# EAGLE board PreContV1 (EAGLE 6.1)
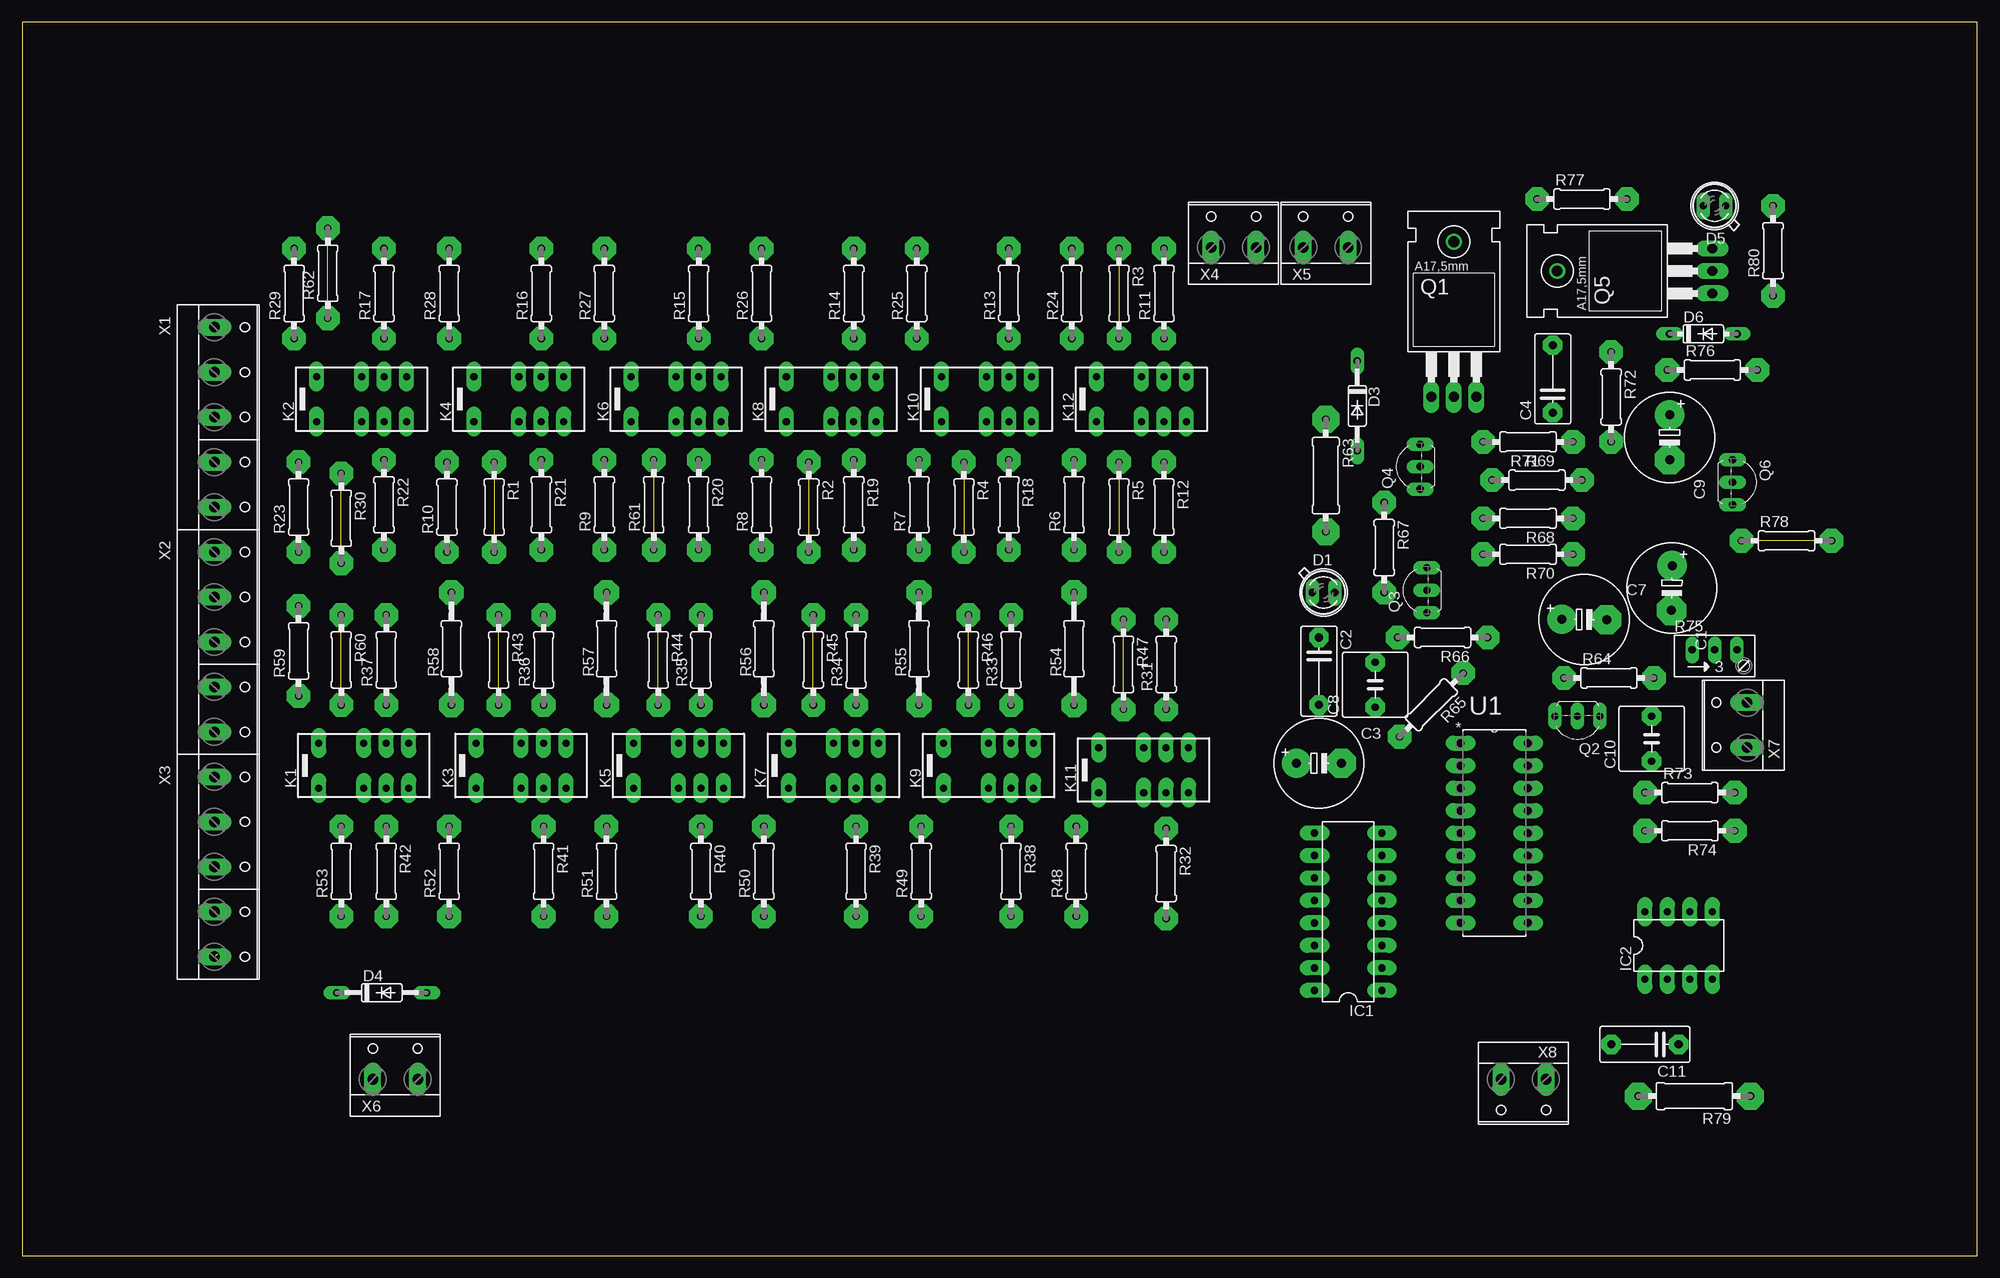
[diagram p0: board, top side]
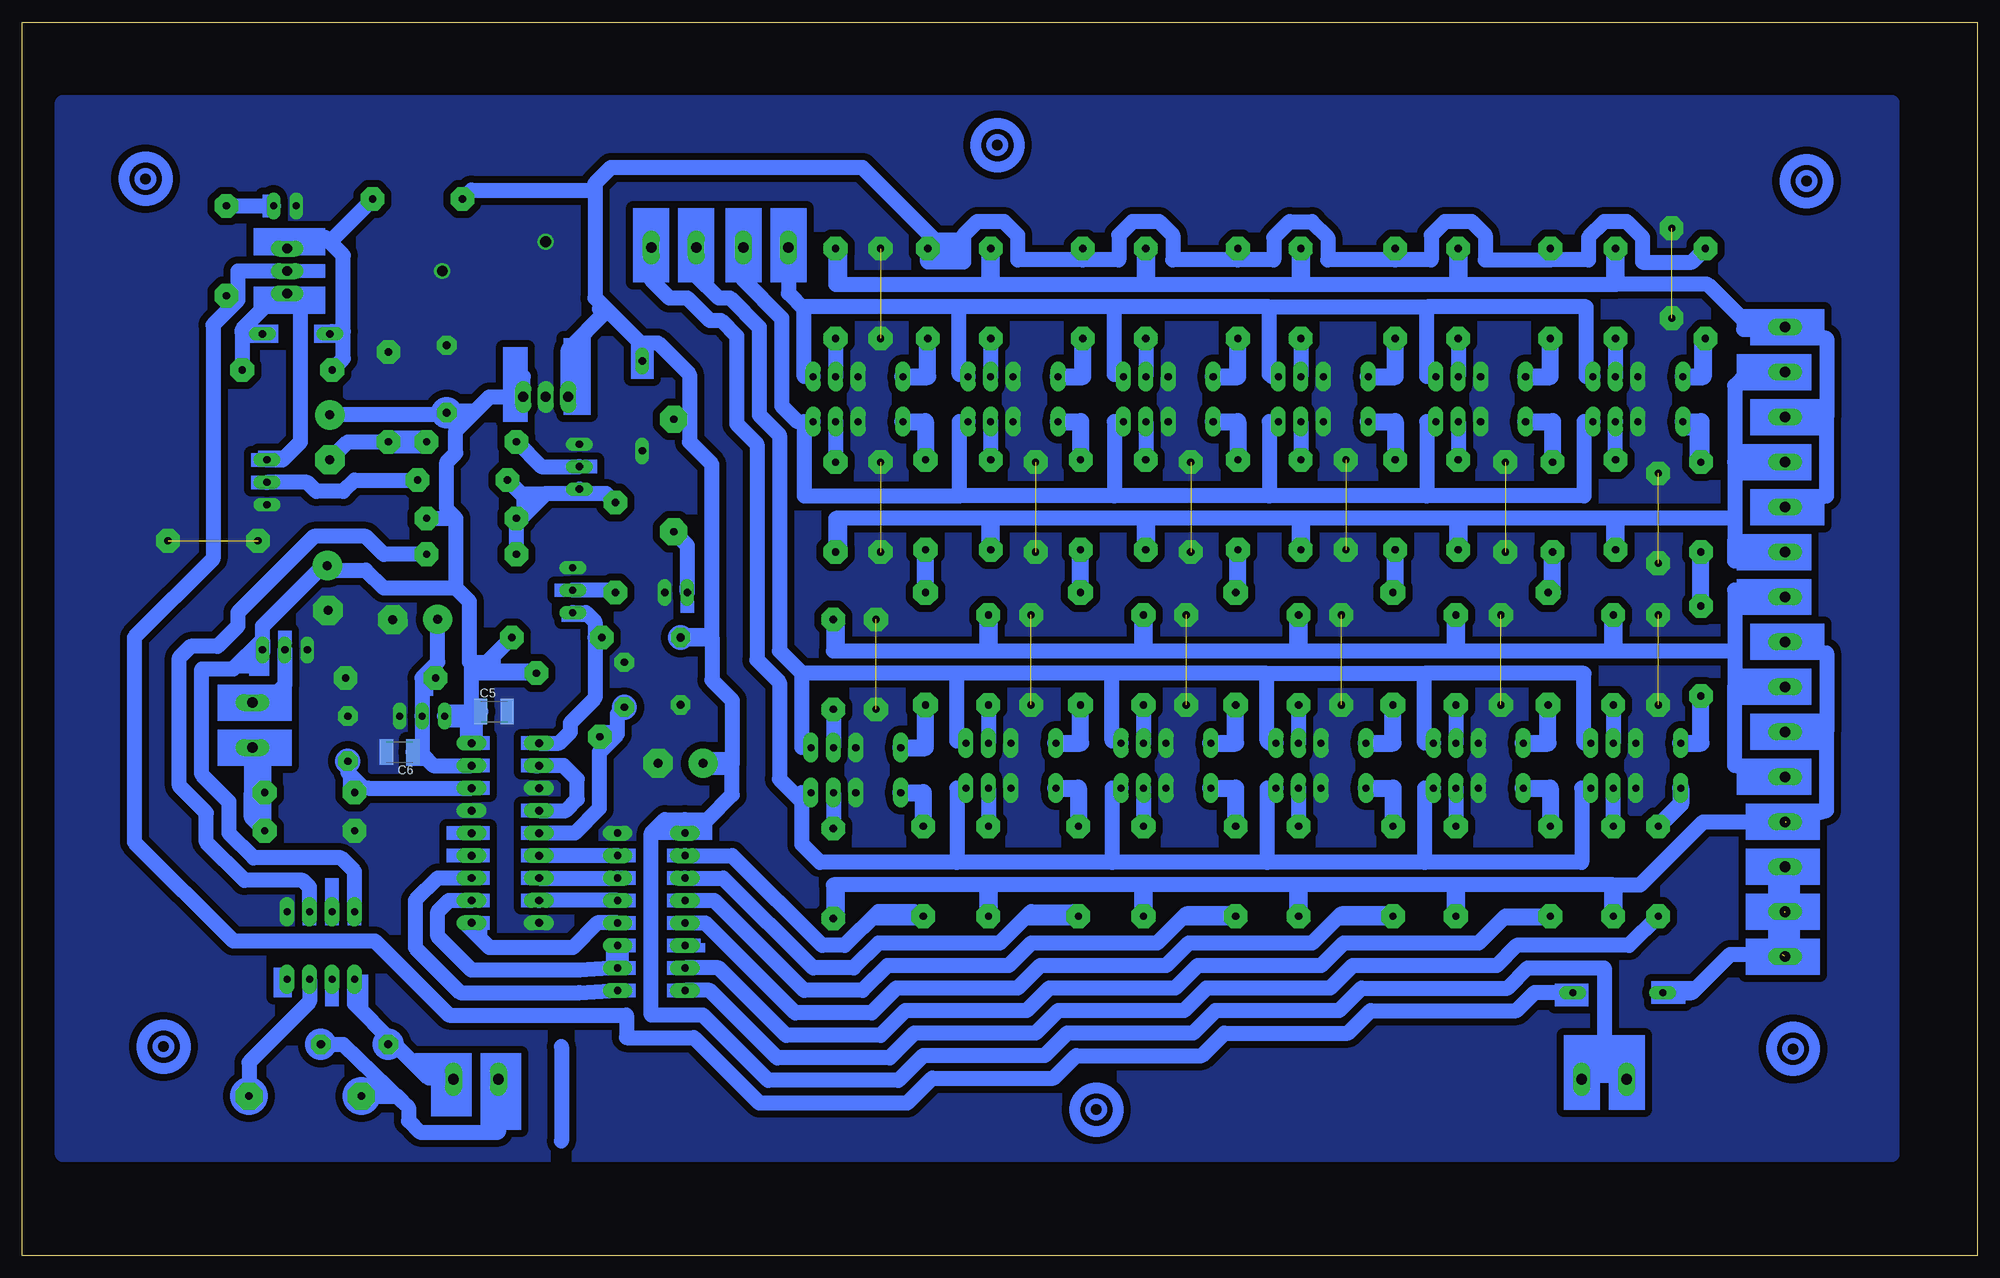
[diagram p1: board, bottom side, seen from below]

Size 220.96 x 139.37 mm. Coordinates in mm from the lower left corner, seen from the top.
Outline: 0,0 220.96,0 220.96,139.37 0,139.37 0,0
Copper layers (1*16): Top 0.035mm / dielectric 1.5mm / Bottom 0.035mm
Design rules: minimum track width 10mil, minimum drill 24mil, track to track 8mil, track to pad 8mil, pad to pad 8mil, via to via 8mil, smd to smd 8mil, copper to edge 40mil, drill to drill 8mil, minimum pad ring 14mil, minimum via ring 8mil, stop-mask expansion 4mil, vias tented up to drill 0mil, thermal gap 10mil

## Footprints (pad centres in the part's own frame; a part is rotated, then mirrored left to right if it is on the bottom)
E5-10,5 = drill 1.016 pad 3.302: + -2.54,0 | drill 1.016 pad 3.302 octagon: - 2.54,0
C075-042X103 = drill 0.914 pad 2.184 octagon: 1 -3.81,0; 2 3.81,0
C1210K = smd 1.5 x 2.9: 1 -1.5,0; 2 1.5,0
C050-075X075 = drill 0.813 pad 2.184 octagon: 1 -2.54,0; 2 2.54,0
SFH482 = drill 0.813 long: A -1.27,0; K 1.27,0
DO35-10 = drill 0.813 long: A 5.08,0; C -5.08,0
DO35-7 = drill 0.813 long: A 3.81,0; C -3.81,0
DIL16 = drill 0.813 pad 1.676 long: 1 -8.89,-3.81; 2 -6.35,-3.81; 3 -3.81,-3.81; 4 -1.27,-3.81; 5 1.27,-3.81; 6 3.81,-3.81; 7 6.35,-3.81; 8 8.89,-3.81; 9 8.89,3.81; 10 6.35,3.81; 11 3.81,3.81; 12 1.27,3.81; 13 -1.27,3.81; 14 -3.81,3.81; 15 -6.35,3.81; 16 -8.89,3.81
DIL08 = drill 0.813 pad 1.676 long: 1 -3.81,-3.81; 2 -1.27,-3.81; 3 1.27,-3.81; 4 3.81,-3.81; 5 3.81,3.81; 6 1.27,3.81; 7 -1.27,3.81; 8 -3.81,3.81
TX2 = drill 0.8 pad 1.676 long: 1 -5.08,-2.54; 3 0,-2.54; 4 2.54,-2.54; 5 5.08,-2.54; 8 5.08,2.54; 9 2.54,2.54; 10 0,2.54; 12 -5.08,2.54
TO220BH = drill 1.118 long: D 0,-6.35; G -2.54,-6.35; S 2.54,-6.35
TO92-EBC = drill 0.813 long: B 0,-1.27; C -2.54,-1.27; E 2.54,-1.27
0207/10 = drill 0.813 pad 2.667 octagon: 1 -5.08,0; 2 5.08,0
0207/12 = drill 0.813 pad 2.794 octagon: 1 -6.35,0; 2 6.35,0
0309/12 = drill 0.813 pad 3.048 octagon: 1 -6.35,0; 2 6.35,0
RJ9W = drill 0.813 long: A 2.54,0.635; E -2.54,0.635; S 0,0.635
DIP254P762X533-18P = drill 0.9 pad 1.676 long: 1 -7.62,20.32; 2 -7.62,17.78; 3 -7.62,15.24; 4 -7.62,12.7; 5 -7.62,10.16; 6 -7.62,7.62; 7 -7.62,5.08; 8 -7.62,2.54; 9 -7.62,0; 10 0,0; 11 0,2.54; 12 0,5.08; 13 0,7.62; 14 0,10.16; 15 0,12.7; 16 0,15.24; 17 0,17.78; 18 0,20.32
W237-5P = drill 1.194 long: 1 -10.16,-0.635; 2 -5.08,-0.635; 3 0,-0.635; 4 5.08,-0.635; 5 10.16,-0.635
W237-132 = drill 1.194 long: 1 -2.54,-0.635; 2 2.54,-0.635

## Placement (x,y rotation side)
C1  1500uF  [E5-10,5]  186.44,75.44 269.2 top
C2  68nF  [C075-042X103]  146.56,66.04 270 top
C3  100uF  [E5-10,5]  146.56,55.63 0 top
C4  68nF  [C075-042X103]  172.97,99.06 90 top
C5  .2  [C1210K]  167.64,61.47 0 bottom
C6  .2  [C1210K]  178.31,56.9 180 bottom
C7  100uF  [E5-10,5]  176.53,71.88 359.7 top
C8  100pF  [C050-075X075]  152.91,64.52 90 top
C9  220uF  [E5-10,5]  186.18,92.46 270 top
C10  10nF  [C050-075X075]  184.15,58.42 90 top
C11  10nF  [C075-042X103]  183.39,23.88 180 top
D1  WHT  [SFH482]  147.07,74.93 0 top
D3  4004  [DO35-10]  150.88,96.01 270 top
D4  0R  [DO35-10]  40.64,29.72 0 top
D5  BLU  [SFH482]  191.26,118.62 180 top
D6  27V  [DO35-7]  189.99,104.14 0 top
IC1  ULN2003AN  [DIL16]  149.86,38.86 90 top
IC2  MID400  [DIL08]  187.2,35.05 0 top
K1  5V  [TX2]  38.61,55.37 0 top
K2  5V  [TX2]  38.35,96.77 0 top
K3  5V  [TX2]  56.39,55.37 0 top
K4  5V  [TX2]  56.13,96.77 0 top
K5  5V  [TX2]  74.17,55.37 0 top
K6  5V  [TX2]  73.91,96.77 0 top
K7  5V  [TX2]  91.69,55.37 0 top
K8  5V  [TX2]  91.44,96.77 0 top
K9  5V  [TX2]  109.22,55.37 0 top
K10  5V  [TX2]  108.97,96.77 0 top
K11  5V  [TX2]  126.75,54.86 0 top
K12  5V  [TX2]  126.49,96.77 0 top
Q1  7805  [TO220BH]  161.8,103.38 0 top
Q2  LM317L  [TO92-EBC]  175.77,59.69 180 top
Q3  BC560C  [TO92-EBC]  157.48,75.18 90 top
Q4  BC560C  [TO92-EBC]  156.72,89.15 90 top
Q5  PMOS  [TO220BH]  184.66,111.25 90 top
Q6  BC560C  [TO92-EBC]  194.56,87.38 270 top
R1  0  [0207/10]  53.34,84.58 270 top
R2  0  [0207/10]  88.9,84.58 270 top
R3  0  [0207/10]  123.95,108.71 270 top
R4  0  [0207/10]  106.43,84.58 270 top
R5  0  [0207/10]  123.95,84.58 270 top
R6  27  [0207/10]  118.87,84.84 90 top
R7  27  [0207/10]  101.35,84.84 90 top
R8  27  [0207/10]  83.57,84.84 90 top
R9  27  [0207/10]  65.79,84.84 90 top
R10  27  [0207/10]  48.01,84.58 90 top
R11  124  [0207/10]  129.03,108.71 90 top
R12  124  [0207/10]  129.03,84.58 270 top
R13  249  [0207/10]  111.51,108.71 90 top
R14  499  [0207/10]  93.98,108.71 90 top
R15  1K  [0207/10]  76.45,108.71 90 top
R16  2K  [0207/10]  58.67,108.71 90 top
R17  4K02  [0207/10]  40.89,108.71 90 top
R18  249  [0207/10]  111.51,84.84 270 top
R19  499  [0207/10]  93.98,84.84 270 top
R20  1K  [0207/10]  76.45,84.84 270 top
R21  2K  [0207/10]  58.67,84.84 270 top
R22  4K02  [0207/10]  40.89,84.84 270 top
R23  27  [0207/10]  31.24,84.58 90 top
R24  27  [0207/10]  118.62,108.71 90 top
R25  27  [0207/10]  101.09,108.71 90 top
R26  27  [0207/10]  83.57,108.71 90 top
R27  27  [0207/10]  65.79,108.71 90 top
R28  27  [0207/10]  48.26,108.71 90 top
R29  27  [0207/10]  30.73,108.71 90 top
R30  0  [0207/10]  36.07,83.31 270 top
R31  124  [0207/10]  129.29,66.8 90 top
R32  124  [0207/10]  129.29,43.18 270 top
R33  249  [0207/10]  111.76,67.31 90 top
R34  499  [0207/10]  94.23,67.31 90 top
R35  1K  [0207/10]  76.71,67.31 90 top
R36  2K  [0207/10]  58.93,67.31 90 top
R37  4K02  [0207/10]  41.15,67.31 90 top
R38  249  [0207/10]  111.76,43.43 270 top
R39  499  [0207/10]  94.23,43.43 270 top
R40  1K  [0207/10]  76.71,43.43 270 top
R41  2K  [0207/10]  58.93,43.43 270 top
R42  4K02  [0207/10]  41.15,43.43 270 top
R43  0  [0207/10]  53.85,67.31 270 top
R44  0  [0207/10]  71.88,67.31 270 top
R45  0  [0207/10]  89.41,67.31 270 top
R46  0  [0207/10]  106.93,67.31 270 top
R47  0  [0207/10]  124.46,66.8 270 top
R48  27  [0207/10]  119.13,43.43 90 top
R49  27  [0207/10]  101.6,43.43 90 top
R50  27  [0207/10]  83.82,43.43 90 top
R51  27  [0207/10]  66.04,43.43 90 top
R52  27  [0207/10]  48.26,43.43 90 top
R53  27  [0207/10]  36.07,43.43 90 top
R54  27  [0207/12]  118.87,68.58 90 top
R55  27  [0207/12]  101.35,68.58 90 top
R56  27  [0207/12]  83.82,68.58 90 top
R57  27  [0207/12]  66.04,68.58 90 top
R58  27  [0207/12]  48.51,68.58 90 top
R59  27  [0207/10]  31.24,68.33 90 top
R60  0  [0207/10]  36.07,67.31 270 top
R61  0  [0207/10]  71.37,84.84 90 top
R62  0  [0207/10]  34.54,111 90 top
R63  2K2  [0309/12]  147.32,88.14 270 top
R64  150  [0207/10]  179.32,65.28 0 top
R65  100K  [0207/10]  159.26,62.23 225 top
R66  2K2  [0207/10]  160.53,69.85 180 top
R67  25K  [0207/10]  153.92,80.01 270 top
R68  3K3  [0207/10]  170.18,83.31 180 top
R69  25K  [0207/10]  170.18,91.95 180 top
R70  0  [0207/10]  170.18,79.25 180 top
R71  25K  [0207/10]  171.2,87.63 0 top
R72  220K  [0207/10]  179.58,97.03 270 top
R73  4K7  [0207/10]  188.47,52.32 0 top
R74  1K  [0207/10]  188.47,48.01 180 top
R75  5K  [RJ9W]  191.26,67.82 0 top
R76  25K  [0207/10]  191.01,100.08 0 top
R77  0  [0207/10]  176.28,119.38 0 top
R78  0  [0207/10]  199.39,80.77 0 top
R79  33K  [0309/12]  188.98,18.03 180 top
R80  3K3  [0207/10]  197.87,113.54 90 top
U1  MX7576  [DIP254P762X533-18P]  170.18,37.59 0 top
X1  [W237-5P]  22.35,94.74 270 top
X2  [W237-5P]  22.35,69.34 270 top
X3  [W237-5P]  22.35,43.94 270 top
X4  [W237-132]  136.91,114.55 0 top
X5  [W237-132]  147.32,114.55 0 top
X6  [W237-132]  42.16,20.57 0 top
X7  [W237-132]  194.31,59.94 90 top
X8  [W237-132]  169.67,19.3 180 top

## Library data of the parts
C1-C11 R1-R74 R76-R80 = resistor
D1 D5 = led
D3 D4 D6 = diode
IC1 = uln-udn
IC2 = linear
K1-K12 = relay; MF: AROMAT/ MATSUSHITA; MPN: TX2-12V; OC_FARNELL: 1200952; OC_NEWARK: 67K1295
Q1 Q5 = transistor-power
Q2-Q4 Q6 = transistor-npn
R75 = pot
U1 = ADI-Phase-2; MPN: AD7575JNZ; OC_FARNELL: 1079349; OC_NEWARK: 19M0875; PACKAGE: DIP-18; SUPPLIER: Analog Devices
X1-X8 = con-wago-508; OC_FARNELL: unknown; OC_NEWARK: unknown

## Nets
GND: C1.- C2.2 C3.- C4.2 C5.2 C6.2 C7.- C8.2 C10.2 D1.K D3.A D5.K IC1.8 IC2.5 K1.3 K1.10 K2.3 K2.10 K3.3 K3.10 K4.3 K4.10 K5.3 K5.10 K6.3 K6.10 K7.3 K7.10 K8.3 K8.10 K9.3 K9.10 K10.3 K10.10 K11.3 K11.10 K12.3 K12.10 Q1.D Q2.C Q3.E Q4.E Q6.E R1.1 R1.2 R2.1 R2.2 R3.1 R3.2 R4.1 R4.2 R5.1 R5.2 R30.1 R30.2 R43.1 R43.2 R44.1 R44.2 R45.1 R45.2 R46.1 R46.2 R47.1 R47.2 R60.1 R60.2 R61.1 R61.2 R62.1 R62.2 R64.2 R72.1 R74.2 R75.E R78.1 R78.2 U1.3 U1.9 U1.15
N$1: D4.A Q5.D R80.1
N$2: R32.2 R38.2 R39.2 R40.2 R41.2 R42.2 X2.3 X2.5 X3.2
N$3: R31.2 R33.2 R34.2 R35.2 R36.2 R37.2 X2.2 X2.4 X3.1
N$4: K1.8 K3.8 K5.8 K7.8 K9.8 K11.8 X5.1
N$5: K1.5 K3.5 K5.5 K7.5 K9.5 K11.5 X5.2
N$6: K11.9 R31.1
N$7: K11.4 R32.1
N$8: K2.8 K4.8 K6.8 K8.8 K10.8 K12.8 X4.1
N$9: K2.5 K4.5 K6.5 K8.5 K10.5 K12.5 X4.2
N$10: R12.2 R18.2 R19.2 R20.2 R21.2 R22.2 X1.2 X1.4 X2.1
N$11: K12.1 R6.2
N$12: K10.1 R7.2
N$13: K8.1 R8.2
N$14: K6.1 R9.2
N$15: R11.2 R13.2 R14.2 R15.2 R16.2 R17.2 X1.1 X1.3 X1.5
N$16: K4.1 R10.2
N$17: K2.1 R23.2
N$18: K12.12 R24.1
N$19: K10.12 R25.1
N$20: K12.9 R11.1
N$21: K12.4 R12.1
N$22: K10.9 R13.1
N$23: K8.9 R14.1
N$24: K6.9 R15.1
N$25: K2.9 R17.1
N$26: K4.9 R16.1
N$27: K10.4 R18.1
N$28: K8.4 R19.1
N$29: K6.4 R20.1
N$30: K4.4 R21.1
N$31: K2.4 R22.1
N$32: K8.12 R26.1
N$33: K6.12 R27.1
N$34: K4.12 R28.1
N$35: K2.12 R29.1
N$36: C2.1 C3.+ D3.C IC1.9 Q1.G R24.2 R25.2 R26.2 R27.2 R28.2 R29.2 R63.1 R77.1 X6.1 X6.2
N$37: K9.9 R33.1
N$38: K7.9 R34.1
N$39: K5.9 R35.1
N$40: K1.9 R37.1
N$41: K3.9 R36.1
N$42: K9.4 R38.1
N$43: K7.4 R39.1
N$44: K5.4 R40.1
N$45: K3.4 R41.1
N$46: K1.4 R42.1
N$47: K11.1 R48.2
N$48: K9.1 R49.2
N$49: K7.1 R50.2
N$50: K5.1 R51.2
N$51: K3.1 R52.2
N$52: K1.1 R53.2
N$53: K11.12 R54.1
N$54: K9.12 R55.1
N$55: K7.12 R56.1
N$56: K5.12 R57.1
N$57: K3.12 R58.1
N$58: K1.12 R59.1
N$59: R6.1 R54.2
N$60: IC1.10 R48.1
N$61: IC1.11 R49.1
N$62: R7.1 R55.2
N$63: R8.1 R56.2
N$64: R9.1 R57.2
N$65: R10.1 R58.2
N$66: R23.1 R59.2
N$67: IC1.12 R50.1
N$68: IC1.13 R51.1
N$69: IC1.15 R52.1
N$70: IC1.16 R53.1
N$71: IC1.7 U1.6
N$72: IC1.6 U1.7
N$73: IC1.5 U1.8
N$74: IC1.4 U1.10
N$75: IC1.2 IC1.3 U1.11
N$76: IC1.1 U1.12
N$77: U1.2 U1.4
N$78: C1.+ C4.1 C5.1 C9.+ IC2.8 Q1.S Q2.E R65.1 R66.1 R68.1 R75.A U1.18
N$79: D1.A R63.2
N$80: C6.1 C7.+ Q2.B R64.1 U1.17
N$81: Q3.C R66.2 U1.1
N$82: C8.1 R65.2 U1.5
N$83: Q6.B R71.2
N$84: C10.1 R73.1 U1.16
N$85: Q3.B R67.2
N$86: Q4.C R67.1 R68.2 R70.2 R71.1
N$87: Q4.B R69.2
N$88: C9.- R69.1 R72.2
N$89: R73.2 R74.1 X7.1
N$90: R75.S X7.2
N$91: D6.A Q5.G Q6.C R76.2
N$92: IC2.6 R70.1
N$93: C11.2 IC2.1 X8.1
N$94: IC2.3 R79.1
N$95: D6.C Q5.S R76.1 R77.2
N$96: D4.C X3.3 X3.4 X3.5
N$97: C11.1 R79.2 X8.2
N$98: D5.A R80.2

## Tracks (layer width: path | path; a pad name or v marks a point on that pad's centre or on a via)
GND  (via drill 1.2)  (15 unrouted)
  other vias: 161.8,114.55 173.48,111.25
  pour Bottom (isolate 0.813, no thermals): 9.65,130.3 9.65,11.43 216.41,11.43 216.41,130.3
N$1
  Bottom 1.676: Q5.D 196.6,111.25 196.6,108.2 | 196.6,108.2 196.6,107.95 199.39,105.16 199.39,78.74 208.28,69.85 208.28,46.74 197.1,35.56 181.1,35.56 172.72,27.18 152.65,27.18 152.65,24.64 145.03,24.64 137.67,17.27 120.9,17.27 118.11,20.07 104.39,20.07 101.85,22.61 87.63,22.61 85.09,25.15 71.12,25.15 68.58,27.69 52.07,27.69 50.04,29.72 D4.A | R80.1 197.36,108.46 197.1,108.2 196.6,108.2
N$2  (1 unrouted)
  Bottom 1.676: X3.2 17.02,50.29 17.02,59.18 | 17.02,59.18 X2.5 | X2.3 17.02,68.07 17.02,59.18 | R42.2 41.15,41.91 | 41.15,41.91 58.93,41.91 | 58.93,41.91 76.71,41.91 | 76.71,41.91 94.23,41.91 | 94.23,41.91 111.76,41.91 | 111.76,41.91 129.29,41.91 R32.2 | R38.2 111.76,41.91 | R41.2 58.93,41.91 | R40.2 76.71,41.91 | R39.2 94.23,41.91 | 41.15,41.91 38.1,41.91 30.99,49.02 21.59,49.02
N$3
  Bottom 1.676: X3.1 27.43,55.37 27.43,64.26 | 27.43,64.26 X2.4 21.59,64.26 | X2.2 27.43,75.18 27.43,68.33 | 27.43,68.33 27.43,64.26 | 111.76,68.33 129.29,68.33 R31.2 | 111.76,68.33 94.23,68.33 | 94.23,68.33 76.71,68.33 | R36.2 58.93,68.33 | R35.2 76.71,68.33 | R34.2 94.23,68.33 | R33.2 111.76,68.33 | 76.71,68.33 58.93,68.33 | 58.93,68.33 41.15,68.33 | 41.15,68.33 R37.2 | 41.15,68.33 27.43,68.33
N$4
  Bottom 1.676: K1.8 44.45,57.91 44.45,65.79 62.48,65.79 | K7.8 97.79,58.17 97.79,65.79 | K11.8 132.84,57.4 132.84,65.79 | 80.26,58.17 80.01,57.91 K5.8 79.76,57.91 80.26,58.17 | K3.8 62.48,57.91 62.48,65.79 | 80.26,65.79 97.79,65.79 | 97.79,65.79 115.32,65.79 | 115.32,65.79 132.84,65.79 | K9.8 115.32,58.17 115.32,65.79 | 80.26,58.17 80.26,65.79 | 80.26,65.79 62.48,65.79 | 132.84,65.79 135.38,68.33 135.38,92.71 137.67,95 137.67,104.9 140.97,108.2 142.24,108.2 144.78,110.74 X5.1
N$5
  Bottom 1.676: K1.5 44.7,52.83 44.7,44.45 62.48,44.45 | K11.5 132.84,52.32 132.84,51.31 | K9.5 115.32,52.83 115.32,44.45 | K7.5 97.79,52.83 97.79,44.45 | K5.5 80.26,52.83 80.26,44.45 | K3.5 62.48,52.83 62.48,44.45 | 62.48,44.45 80.26,44.45 | 80.26,44.45 97.79,44.45 | 97.79,44.45 115.32,44.45 | 132.84,51.31 135.38,53.85 135.38,64.77 137.92,67.31 137.92,91.69 140.21,93.98 140.21,103.89 141.99,105.66 143.26,105.66 145.8,108.2 147.83,108.2 149.86,110.24 X5.2 | 115.32,44.45 130.81,44.45 132.84,46.48 132.84,51.31
N$6
  Bottom 1.676: R31.1 K11.9
N$7
  Bottom 1.676: K11.4 R32.1
N$8
  Bottom 1.676: K2.8 44.2,99.31 44.2,107.19 62.23,107.19 | K8.8 97.54,99.57 97.54,107.19 | K12.8 132.59,99.31 132.59,106.93 | K4.8 62.23,99.31 62.23,107.19 | 80.01,107.19 97.54,107.19 | 97.54,107.19 115.06,107.19 | 115.06,107.19 132.59,107.19 132.59,106.93 | K10.8 115.06,99.57 115.06,107.19 | 79.76,99.31 K6.8 79.5,99.31 80.01,99.57 80.01,107.19 | 80.01,107.19 62.23,107.19 | X4.1 134.37,108.71 132.59,106.93
N$9
  Bottom 1.676: K2.5 44.45,94.23 44.45,85.85 62.23,85.85 | 132.59,94.23 132.59,85.85 115.06,85.85 | K10.5 115.06,94.23 115.06,85.85 | K8.5 97.54,94.23 97.54,85.85 | K6.5 80.01,94.23 80.01,85.85 | K4.5 62.23,94.23 62.23,85.85 | 62.23,85.85 80.01,85.85 | 80.01,85.85 97.54,85.85 | 97.54,85.85 115.06,85.85 | 132.59,94.23 133.35,94.23 135.13,96.01 135.13,105.92 139.45,110.24 X4.2 | K12.5 132.59,94.23
N$10
  Bottom 1.676: X2.1 27.43,80.77 | 27.43,89.66 X1.4 | R22.2 40.89,83.31 | 40.89,83.31 58.67,83.31 | 58.67,83.31 76.45,83.31 | 76.45,83.31 93.98,83.31 | 93.98,83.31 111.51,83.31 | 111.51,83.31 129.03,83.31 R12.2 | R18.2 111.51,83.31 | R21.2 58.67,83.31 | R20.2 76.45,83.31 | R19.2 93.98,83.31 | 27.43,78.49 27.43,80.77 | X1.2 21.97,99.57 26.16,99.57 27.43,98.3 27.43,89.66 | 27.43,83.31 40.89,83.31 | 27.43,89.66 27.43,83.31 | 27.43,83.31 27.43,80.77
N$11
  Bottom 1.93: K12.1 118.87,94.23 R6.2
N$12
  Bottom 1.93: K10.1 101.35,94.23 R7.2
N$13
  Bottom 1.93: K8.1 83.57,94.23 R8.2
N$14
  Bottom 1.93: K6.1 65.79,94.23 R9.2
N$15
  Bottom 1.676: X1.1 17.02,103.63 17.02,94.74 | 17.02,94.74 X1.3 | X1.5 17.02,85.85 17.02,94.74 | 111.51,109.73 129.03,109.73 R11.2 | 111.51,109.73 93.98,109.73 | 93.98,109.73 76.45,109.73 | R16.2 58.67,109.73 | R15.2 76.45,109.73 | R14.2 93.98,109.73 | R13.2 111.51,109.73 | 76.45,109.73 58.67,109.73 | 58.67,109.73 40.89,109.73 | 40.89,109.73 R17.2 | X1.1 21.72,105.92 22.73,104.9 | 40.89,109.73 30.48,109.73 26.42,105.66 26.42,104.65 26.16,104.9 25.65,104.9 | 25.65,104.9 22.1,104.9 | 25.65,104.9 25.91,104.65 | 25.91,104.65 26.16,104.65 | 25.91,104.65 23.62,104.65 23.37,104.9 X1.1
N$16
  Bottom 1.93: K4.1 48.01,94.23 R10.2
N$17
  Bottom 1.676: 33.27,94.49 K2.1
  Bottom 1.93: K2.1 31.24,94.23 R23.2
N$18
  Bottom 1.93: K12.12 118.62,99.31 R24.1
N$19
  Bottom 1.93: K10.12 101.09,99.31 R25.1
N$20
  Bottom 1.676: R11.1 K12.9
N$21
  Bottom 1.676: K12.4 R12.1
N$22
  Bottom 1.676: R13.1 K10.9
N$23
  Bottom 1.676: R14.1 K8.9
N$24
  Bottom 1.676: R15.1 K6.9
N$25
  Bottom 1.676: R17.1 K2.9
N$26
  Bottom 1.676: R16.1 K4.9
N$27
  Bottom 1.676: K10.4 R18.1
N$28
  Bottom 1.676: K8.4 R19.1
N$29
  Bottom 1.676: K6.4 R20.1
N$30
  Bottom 1.676: K4.4 R21.1
N$31
  Bottom 1.676: R22.1 K2.4
N$32
  Bottom 1.93: K8.12 83.57,99.31 R26.1
N$33
  Bottom 1.93: K6.12 65.79,99.31 R27.1
N$34
  Bottom 1.93: K4.12 48.26,99.31 R28.1
N$35
  Bottom 1.93: K2.12 30.99,99.31 30.99,103.63 R29.1
N$36
  Bottom 1.676: 65.79,112.52 73.41,112.52 73.41,115.06 75.18,116.84 77.72,116.84 79.5,115.06 79.5,112.52 83.57,112.52 | 83.57,112.52 90.93,112.52 90.93,115.32 92.46,116.84 95.5,116.84 97.03,115.32 97.03,112.52 101.09,112.52 | 101.09,112.52 108.46,112.52 108.46,115.32 109.98,116.84 113.03,116.84 114.55,115.32 114.55,112.27 118.62,112.27 | 48.26,112.52 55.63,112.52 55.63,115.32 57.15,116.84 60.2,116.84 61.72,115.32 61.72,112.52 65.79,112.52 | R28.2 48.26,112.52 | R27.2 65.79,112.52 | R26.2 83.57,112.52 | R25.2 101.09,112.52 | 118.62,112.27 R24.2 | R29.2 32.26,112.27 37.85,112.27 37.85,115.06 39.62,116.84 42.16,116.84 43.94,115.06 43.94,112.52 48.26,112.52 | 118.62,112.27 117.86,113.03 116.08,113.03 125.98,122.94 154.43,122.94 156.21,121.16 156.21,120.4 | 156.21,120.4 156.21,108.2 155.32,107.31 | 155.32,107.31 154.69,106.68 | 154.69,106.68 151.13,103.12 150.88,103.12 | 150.88,103.12 149.1,103.12 145.54,99.57 145.54,94.49 | 145.54,94.49 145.54,91.95 143,89.41 143,69.85 | 143,69.85 143,65.02 140.72,62.74 140.72,55.63 | C3.+ 140.72,55.63 | C2.1 143,69.85 | Q1.G 159.26,102.36 154.94,106.68 154.69,106.68 | X6.1 39.75,20.83 42.16,20.83 | 44.7,20.83 X6.2 | 44.96,21.08 44.7,20.83 | D3.C 150.88,103.12 | 42.16,20.83 44.7,20.83 | 155.7,106.93 155.32,107.31 | R63.1 145.54,94.49 | R77.1 170.18,120.4 156.21,120.4 | 42.16,20.83 42.16,32.51 50.8,32.51 53.09,30.23 69.6,30.23 72.14,27.69 86.11,27.69 88.65,25.15 102.87,25.15 105.41,22.61 119.13,22.61 121.92,19.81 136.65,19.81 144.02,27.18 149.86,27.18 149.86,47.75 148.34,49.28 146.05,49.28 | 146.05,49.28 143.51,49.28 140.72,52.07 140.72,55.63 | IC1.9 146.05,49.28
N$37
  Bottom 1.676: R33.1 K9.9
N$38
  Bottom 1.676: R34.1 K7.9
N$39
  Bottom 1.676: R35.1 K5.9
N$40
  Bottom 1.676: R37.1 K1.9
N$41
  Bottom 1.676: R36.1 K3.9
N$42
  Bottom 1.676: K9.4 R38.1
N$43
  Bottom 1.676: K7.4 R39.1
N$44
  Bottom 1.676: K5.4 R40.1
N$45
  Bottom 1.676: K3.4 R41.1
N$46
  Bottom 1.676: R42.1 K1.4
N$47
  Bottom 1.93: K11.1 119.13,52.32 R48.2
N$48
  Bottom 1.93: K9.1 101.6,52.83 R49.2
N$49
  Bottom 1.93: K7.1 83.82,52.83 R50.2
N$50
  Bottom 1.93: K5.1 66.04,52.83 R51.2
N$51
  Bottom 1.93: K3.1 48.26,52.83 R52.2
N$52
  Bottom 1.93: K1.1 33.53,51.05 R53.2
N$53
  Bottom 1.93: K11.12 118.87,57.4 R54.1
N$54
  Bottom 1.93: K9.12 101.35,57.91 R55.1
N$55
  Bottom 1.93: K7.12 83.82,57.91 R56.1
N$56
  Bottom 1.93: K5.12 66.04,57.91 R57.1
N$57
  Bottom 1.93: K3.12 48.51,57.91 R58.1
N$58
  Bottom 1.93: K1.12 31.24,57.91 R59.1
N$59
  Bottom 1.93: R54.2 R6.1
N$60
  Bottom 1.676: R48.1 120.14,38.86 124.21,38.86 128.02,35.05 130.56,35.05 140.72,45.21 IC1.10
N$61
  Bottom 1.676: R49.1 102.11,38.86 106.93,38.86 110.49,35.31 124.21,35.31 127,32.51 131.57,32.51 141.73,42.67 IC1.11
N$62
  Bottom 1.93: R55.2 R7.1
N$63
  Bottom 1.93: R56.2 83.57,74.93 R8.1
N$64
  Bottom 1.93: R57.2 65.79,74.93 R9.1
N$65
  Bottom 1.93: R58.2 48.01,74.93 R10.1
N$66
  Bottom 1.93: R59.2 R23.1
N$67
  Bottom 1.676: R50.1 84.07,38.61 89.41,38.61 92.71,35.31 106.93,35.31 109.47,32.77 123.19,32.77 125.98,29.97 132.59,29.97 142.75,40.13 IC1.12
N$68
  Bottom 1.676: R51.1 66.29,38.61 71.88,38.61 75.18,35.31 89.15,35.31 91.69,32.77 105.92,32.77 108.46,30.23 122.17,30.23 124.97,27.43 133.6,27.43 143.76,37.59 IC1.13
N$69
  Bottom 1.676: R52.1 53.34,38.35 56.39,35.31 71.63,35.31 74.17,32.77 88.14,32.77 90.68,30.23 104.9,30.23 107.44,27.69 121.16,27.69 123.95,24.89 134.62,24.89 142.24,32.51 IC1.15
N$70
  Bottom 1.676: R53.1 39.37,35.05 52.07,35.05 54.36,32.77 70.61,32.77 73.15,30.23 87.12,30.23 89.66,27.69 103.89,27.69 106.43,25.15 120.14,25.15 122.94,22.35 135.64,22.35 143.26,29.97 IC1.16 146.56,29.97
N$71
  Bottom 1.676: IC1.7 U1.6
N$72
  Bottom 1.676: U1.7 IC1.6 153.16,42.67
N$73
  Bottom 1.676: IC1.5 U1.8
N$74
  Bottom 1.676: IC1.4 155.96,37.59 158.75,34.8 168.15,34.8 170.94,37.59 U1.10
N$75
  Bottom 1.676: U1.11 172.72,40.13 173.99,38.86 173.99,36.07 170.18,32.26 157.99,32.26 IC1.2 IC1.3
N$76
  Bottom 1.676: U1.12 173.99,42.67 176.53,40.13 176.53,34.8 171.45,29.72 157.99,29.72 IC1.1
N$77
  Bottom 1.676: U1.4 159.51,50.29 158.24,51.56 158.24,53.85 159.77,55.37 U1.2 163.07,55.37
N$78
  Bottom 1.676: 170.18,61.47 170.18,61.72 | 170.18,66.04 170.18,66.29 | 170.18,60.71 169.93,60.96 169.93,61.47 C5.1 169.39,61.72 170.18,61.72 | 170.18,60.71 U1.18 | Q2.E 170.18,61.47 | 170.18,61.47 170.18,60.71 | R65.1 163.32,66.04 170.18,66.04 | 170.18,61.72 170.18,66.04 | R66.1 169.16,66.29 170.18,66.29 | 164.34,99.31 Q1.S 168.15,97.03 170.18,95 | 170.18,95 172.72,95 C4.1 173.23,95 C9.+ | 193.8,69.6 R75.A 193.8,68.07 | 186.69,77.47 187.58,77.34 193.8,71.12 193.8,69.6 | 186.69,77.47 186.44,77.47 | 186.44,77.47 182.12,77.47 180.09,75.44 171.96,75.44 | IC2.8 183.39,43.43 184.91,44.96 194.82,44.96 197.61,47.75 197.61,51.31 200.66,54.36 200.66,66.29 197.1,66.29 193.8,69.6 | C1.+ 186.44,77.94 186.44,77.47 | 186.69,77.47 187.45,77.47 | 170.18,95 171.96,93.22 171.96,90.68 172.97,89.66 172.97,84.33 171.96,83.31 | 171.96,83.31 171.96,75.44 | R68.1 171.96,83.31 | 171.96,75.44 170.43,73.91 170.43,67.06 170.18,66.8 170.18,66.29
N$79
  Bottom 1.676: R63.2 145.8,80.26 D1.A 145.8,75.69
N$80  (1 unrouted)
  Bottom 1.676: 175.77,56.64 Q2.B 175.77,65.28 | 175.77,56.64 174.5,55.37 U1.17 | C6.1 176.55,56.64 175.77,56.64 | R64.1 175.77,65.28 | 175.77,65.28 173.99,67.06 173.99,71.88
N$81
  Bottom 1.676: U1.1 160.27,57.91 159,59.18 159,60.2 156.21,62.99 156.21,69.85 | Q3.C 157.23,72.64 156.21,71.63 156.21,69.85 | R66.2 156.21,69.85
N$82
  Bottom 1.676: U1.5 158.5,47.75 155.7,50.55 155.7,56.9 154.69,57.91 | 154.69,57.91 153.67,58.93 153.67,61.21 C8.1 | R65.2 155.41,58.64 154.69,57.91
N$83
  Bottom 1.676: R71.2 183.39,87.63 184.66,86.36 187.71,86.36 188.72,87.38 Q6.B
N$84
  Bottom 1.676: 169.93,52.83 U1.16 181.86,52.83 182.37,52.83 | R73.1 182.88,52.83 182.37,52.83 | C10.1 184.15,54.61 182.37,52.83
N$85
  Bottom 1.676: R67.2 154.18,75.18 Q3.B
N$86
  Bottom 1.676: 157.99,86.11 161.8,86.11 163.58,84.33 | Q4.C 157.99,86.11 | R70.2 R68.2 164.59,83.31 163.58,84.33 | R67.1 154.94,86.11 157.99,86.11 | R71.1 163.32,84.84 163.58,84.33
N$87
  Bottom 1.676: R69.2 162.31,89.15 Q4.B
N$88
  Bottom 1.676: R69.1 R72.2 184.15,91.95 C9.-
N$89
  Bottom 1.676: X7.1 195.07,57.28 195.07,52.32 | R73.2 195.07,52.32 | R74.1 195.07,49.53 195.07,52.32
N$90
  Bottom 1.676: R75.S 191.26,64.52 193.29,62.48 X7.2
N$91
  Bottom 1.676: 196.09,104.14 R76.2 | 189.48,107.19 Q5.G 192.02,108.71 196.09,104.65 196.09,104.39 196.09,104.14 | Q6.C 191.52,89.92 189.48,91.95 189.48,107.19 | 189.48,107.19 189.48,107.44 | D6.A 196.09,104.14
N$92
  Bottom 1.676: IC2.6 188.47,41.66 189.23,42.42 195.83,42.42 200.15,46.74 200.15,50.04 203.2,53.09 203.2,67.56 201.93,68.83 198.88,68.83 196.6,71.12 196.6,72.64 187.96,81.28 182.12,81.28 180.09,79.25 R70.1
N$93
  Bottom 1.676: X8.1 172.34,20.07 175.01,20.07 179.2,24.26 | 179.2,24.26 183.39,28.45 IC2.1 | C11.2 179.2,24.26
N$94
  Bottom 1.676: IC2.3 188.47,28.7 195.33,21.84 R79.1
N$95
  Bottom 1.676: R76.1 184.66,101.35 184.66,104.39 | 184.66,104.39 184.66,113.03 185.93,114.3 | 185.93,114.3 186.69,115.06 190.75,115.06 191.01,114.81 Q5.S | 185.93,104.39 185.42,104.39 | 185.42,104.39 184.66,104.39 | R77.2 185.93,114.81 185.93,114.3 | D6.C 185.42,104.14 185.42,104.39
N$96  (2 unrouted)
  Bottom 1.676: X3.5 21.84,33.91 21.59,34.16 21.59,39.12 21.84,38.86 | X3.4 X3.3 | D4.C 32.26,29.72 27.94,34.04 22.1,34.04
N$97
  Bottom 1.676: X8.2 167.13,13.97 176.02,13.97 177.29,15.24 177.29,16.76 177.94,17.38 | C11.1 184.66,23.88 177.94,17.38 | R79.2 178.56,18.03 178.56,18.01 177.94,17.38
N$98
  Bottom 1.676: R80.2 D5.A
N$100
  Bottom 1.676: 160.02,23.62 160.02,12.95
(copper drawn outside any net)
  shapes: Bottom area x174, Bottom circle x28